# Altium PCB NetV520.PcbDoc
Units mil, origin at the board's own origin, x right, y up, seen from the top; angles counter-clockwise.
Board outline 2215 x 1456.69 mil, 2 copper layers (Top Layer, Bottom Layer); 83 components, 81 nets, 326 pads, 111 vias.
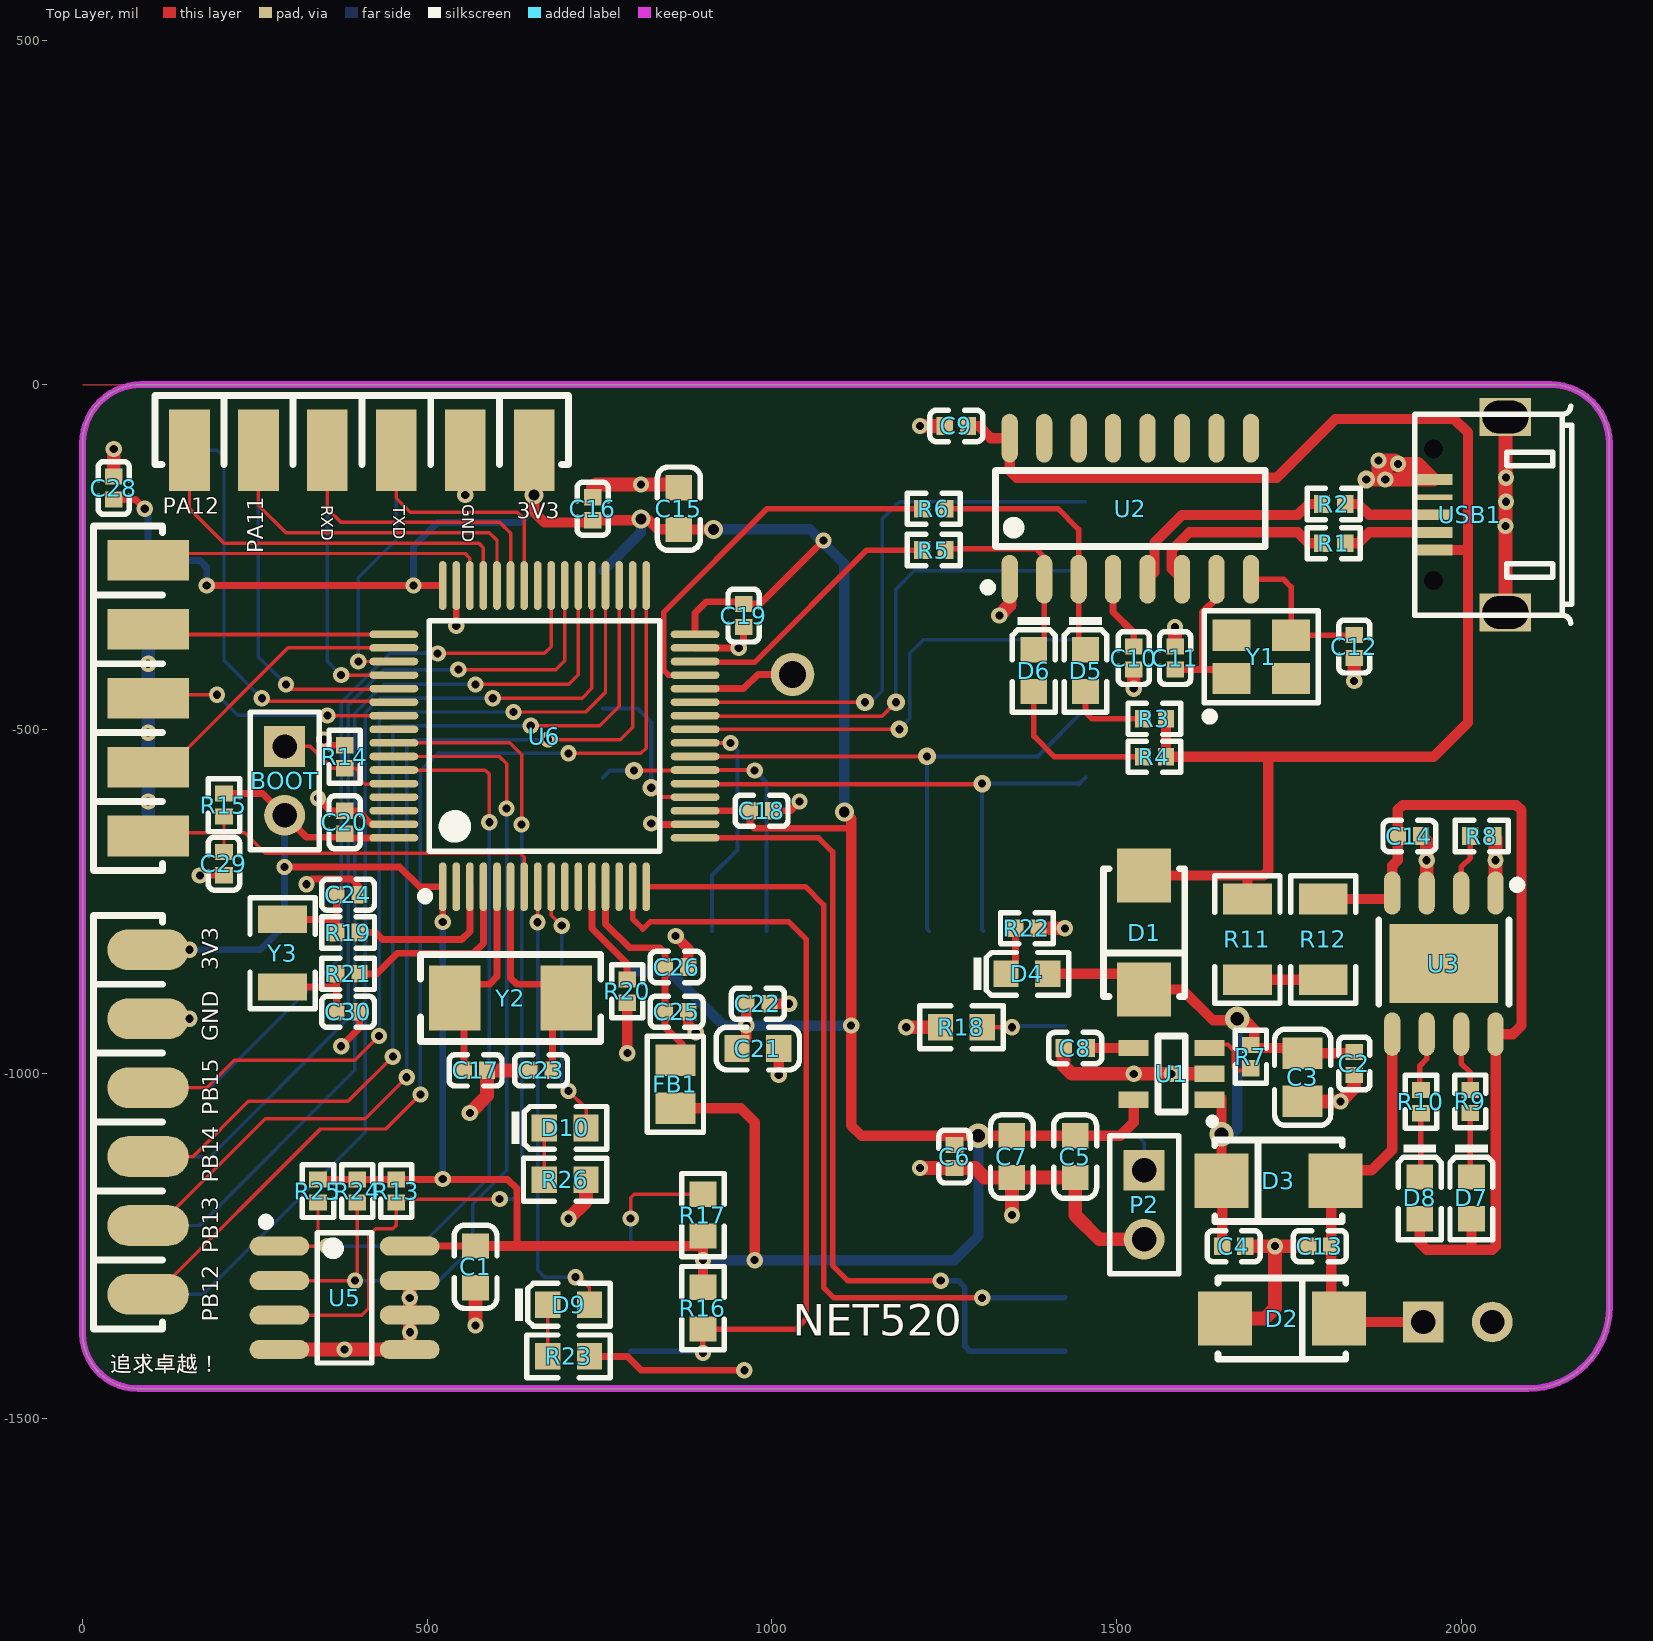
[diagram p0: Top Layer view]
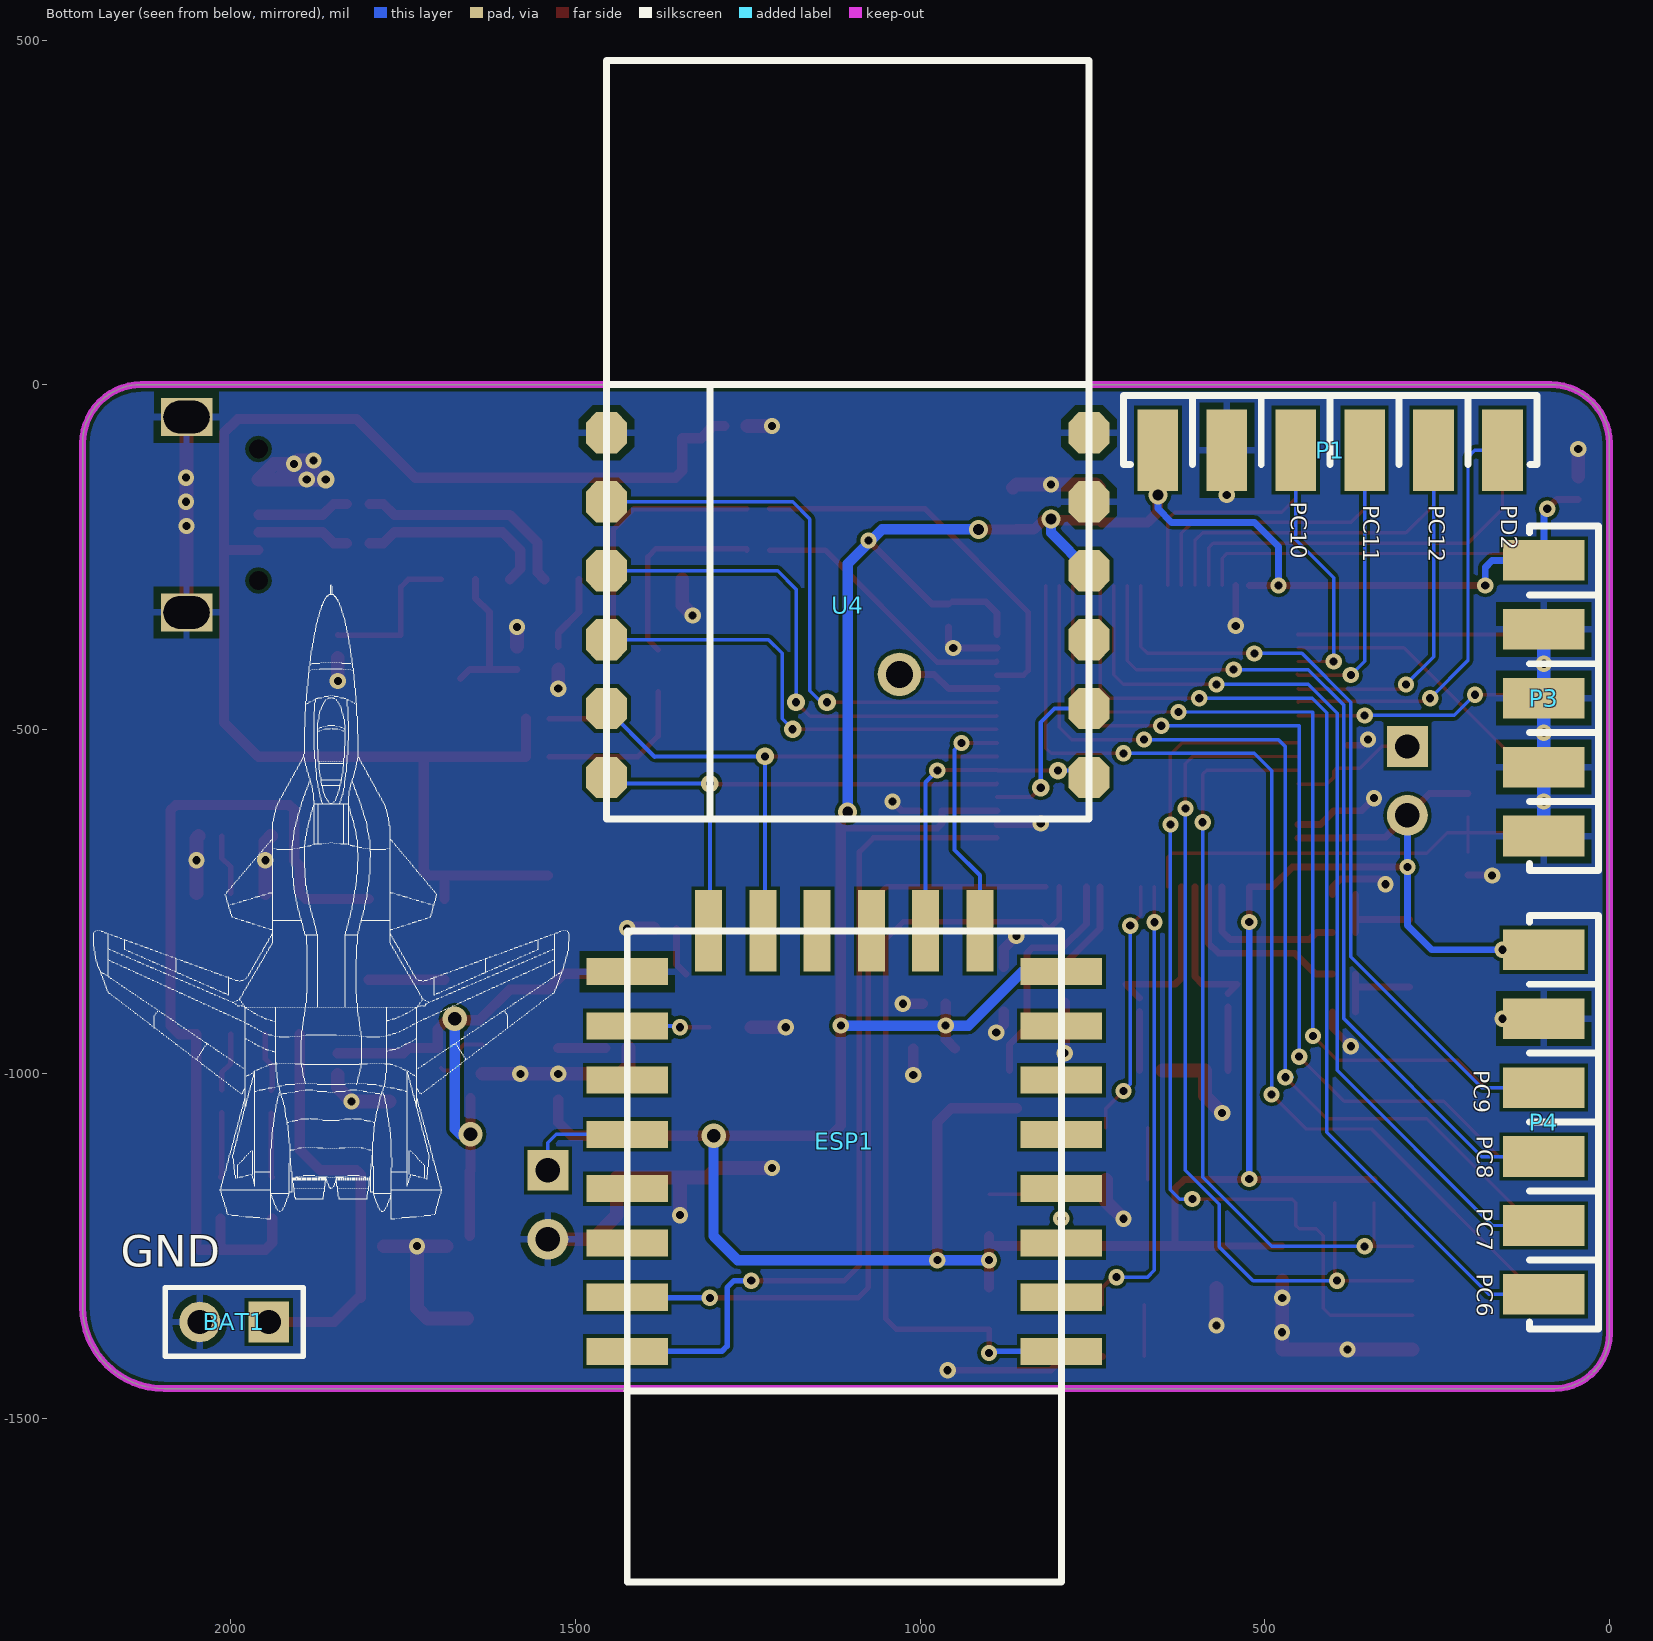
[diagram p1: Bottom Layer view, seen from below]

## Layer stack, top to bottom
Top Solder: solder mask 0.4, Solder Resist, Dk 3.5
Top Layer: signal copper 1.4
Dielectric 1: dielectric 12.6, FR-4, Dk 4.8
Bottom Layer: signal copper 1.4
Bottom Solder: solder mask 0.4, Solder Resist, Dk 3.5

## Board outline
0,-1376.69 ccw(c80,-1376.69) 80,-1456.69 2096.89,-1456.69 ccw(c2096.89,-1338.58) 2215,-1338.58 2215,-85 ccw(c2130,-85) 2130,0 85,0 ccw(c85,-85) 0,-85

## Design rules (kind name [scope] priority, off if disabled: settings)
Clearance [All] p1: gap=5 ignorepadtopadclearanceinfootprint=FALSE except(0: Arc-Hole Track-Hole SMDPad-Hole THPad-Hole Via-Hole Fill-Hole Poly-Hole Region-Hole Text-Hole; 10: Arc-Text Track-Text SMDPad-Text THPad-Text Via-Text Fill-Text Poly-Text Region-Text Text-Text)
DiffPairsRouting [All] p1: maxlimit=10 minlimit=10 mostfreqgap=10 toplayer_minwidth=15 toplayer_maxwidth=15 toplayer_prefwidth=15 bottomlayer_minwidth=15 bottomlayer_maxwidth=15 bottomlayer_prefwidth=15 maxuncoupledlength=500
PolygonConnect [All] p1: thpad.connectstyle=Relief thpad.reliefconductorwidth=10 thpad.reliefentries=4 thpad.polygonreliefangle="90 Angle" thpad.airgapwidth=10 smdpad.connectstyle=Relief smdpad.reliefconductorwidth=10 smdpad.reliefentries=4 smdpad.polygonreliefangle="90 Angle" smdpad.airgapwidth=10 via.connectstyle=Direct via.reliefconductorwidth=10 via.reliefentries=4 via.polygonreliefangle="90 Angle" via.airgapwidth=10
RoutingVias [All] p1: holewidth=28 width=50 viastyle="Through Hole" minholewidth=11.81 minwidth=23.62 maxholewidth=28 maxwidth=50
SolderMaskExpansion [All] p1: expansion=4
Width [All] p1: maxlimit=80 minlimit=5 preferedwidth=10 minimp=50.000000 maximp=50.000000 favimp=50.000000
29 further rules are at their usual default settings.

## Classes and differential pairs
differential pair USB: +USB_P -USB_N
differential pair USB0: +USB0_P -USB0_N

## Components (designator, comment, footprint, x,y, rotation, side; value= is the part's Value field where it differs from the comment)
BAT1 "Header 2" HDR1X2 1945,-1360 r0 bottom
BOOT "Header 2" HDR1X2 292.95,-525 r270 top
C1 "22uF (226) 20% 6.3V" 0603_C 570,-1280 r90 top
C2 "1.0uF (105) 10% 25V" 0402_C 1845,-985 r90 top
C3 "22uF (226) 20% 25V" 0805_C 1770,-1005 r90 top
C4 "10nF (103) 10% 50V" 0402_C 1670,-1250 r180 top
C5 "2.2uF (225) 10% 16V" 0603_C 1440,-1120 r270 top
C6 "10nF (103) 10% 50V" 0402_C 1265,-1120 r270 top
C7 "22uF (226) 20% 6.3V" 0603_C 1348.27,-1120 r270 top
C8 "22nF (223) 10% 50V" 0402_C 1440,-962.6 r180 top
C9 "4.7uF (475) 20% 10V" 0402_C 1267.64,-60 r0 top
C10 "1.0uF (105) 10% 25V" 0402_C 1525,-396.73 r90 top
C11 "22pF (220) 5% 50V" 0402_C 1585,-396.73 r270 top
C12 "22pF (220) 5% 50V" 0402_C 1845,-380 r90 top
C13 "10uF" 0402_C 1795,-1250 r0 top
C14 "10uF" 0402_C 1925,-655 r180 top
C15 "22uF (226) 20% 6.3V" 0603_C 865,-180 r90 top
C16 "100nF (104) 10% 16V" 0402_C 740,-180 r270 top
C17 "20pF (200) 5% 50V" 0402_C 570,-995 r180 top
C18 "100nF (104) 10% 16V" 0402_C 985,-618.27 r180 top
C19 "100nF (104) 10% 16V" 0402_C 958.9,-335 r90 top
C20 "100nF (104) 10% 16V" 0402_C 380,-635 r270 top
C21 "22uF (226) 20% 6.3V" 0603_C 979.64,-963.27 r180 top
C22 "100nF (104) 10% 16V" 0402_C 979.64,-898.27 r180 top
C23 "20pF (200) 5% 50V" 0402_C 665,-995 r0 top
C24 "4.7pF (4R7) 0.25pF 50V" 0402_C 385,-740 r180 top
C25 "100nF (104) 10% 16V" 0402_C 861.77,-910 r0 top
C26 "10nF (103) 10% 50V" 0402_C 861.77,-845 r0 top
C28 "100nF (104) 10% 16V" 0402_C 45,-150 r90 top
C29 "100nF (104) 10% 16V" 0402_C 205,-695 r90 top
C30 "4.7pF (4R7) 0.25pF 50V" 0402_C 385,-910 r180 top
D1 "SS54" SMA(DO-214AC)_S1 1540,-795 r90 top
D2 "M7" SMA(DO-214AC)_S1 1740,-1355 r180 top
D3 "SS54" SMA(DO-214AC)_S1 1735,-1155 r0 top
D4 "白灯 0603" 0603_LED_S1 1370,-855 r0 top
D5 "黄灯 0603" 0603_LED_S1 1455,-415 r270 top
D6 "绿灯 0603" 0603_LED_S1 1380,-415 r270 top
D7 "红灯 0603" 0603_LED_S1 2015,-1180 r270 top
D8 "绿灯 0603" 0603_LED_S1 1940,-1180 r270 top
D9 "蓝灯 0603" 0603_LED_S1 705,-1335 r0 top
D10 "黄灯 0603" 0603_LED_S1 700,-1078.51 r0 top
ESP1 "ESP-12" ESP-12 1110,-1265 r0 bottom locked
FB1 "600Ω ±25% 100MHz" 0805_L 860,-1015 r90 top
P1 "Header 6X2A" "SMT-HEADER 6*2"#1 405,-95 r90 bottom
P2 "Header 2" HDR1X2 1540,-1140 r270 top
P3 "Header 5X2A" "SMT HEADER 5*2" 95,-455 r180 bottom
P4 "Header 6X2A" "SMT-HEADER 6*2"#2 95,-1070 r180 bottom
R1 "0Ω (0R0) ±1%" 0402_R 1815,-230 r180 top
R2 "0Ω (0R0) ±1%" 0402_R 1815,-173.23 r180 top
R3 "2KΩ (2001) ±1%" 0402_R 1555,-485 r0 top
R4 "2KΩ (2001) ±1%" 0402_R 1555,-540 r180 top
R5 "51Ω (51R0) ±1%" 0402_R 1235,-240 r0 top
R6 "51Ω (51R0) ±1%" 0402_R 1235,-180 r0 top
R7 "0Ω (0R0) ±1%" 0402_R 1695,-975 r270 top
R8 "1.2KΩ" 0402_R 2030,-655 r180 top
R9 "1KΩ" 0402_R 2013.27,-1040.04 r270 top
R10 "1KΩ" 0402_R 1941.73,-1040.31 r270 top
R11 "0.1Ω (R100) ±1%" 1206_R 1690,-805 r270 top
R12 "0.1Ω (R100) ±1%" 1206_R 1800,-805 r90 top
R13 "200KΩ (2003) ±1%" 0402_R 455,-1170 r90 top
R14 "10KΩ (1002) ±1%" 0402_R 380,-540 r90 top
R15 "10KΩ (1002) ±1%" 0402_R 205,-610 r270 top
R16 "10KΩ" 0603_R 900,-1340 r270 top
R17 "1KΩ" 0603_R 900,-1205 r90 top
R18 "1KΩ" 0603_R 1275,-932.4 r180 top
R19 "0Ω (0R0) ±1%" 0402_R 385,-795 r0 top
R20 "0Ω (0R0) ±1%" 0402_R 790,-880 r270 top
R21 "0Ω (0R0) ±1%" 0402_R 385,-855 r0 top
R22 "7.5KΩ (7501) ±1%" 0402_R 1370,-788.9 r0 top
R23 "3KΩ (3001) ±1%" 0603_R 705,-1410 r0 top
R24 "10KΩ (1002) ±1%" 0402_R 398.27,-1170 r90 top
R25 "10KΩ (1002) ±1%" 0402_R 341.42,-1170 r90 top
R26 "3KΩ (3001) ±1%" 0603_R 700,-1153.51 r0 top
U1 "BL9193-33" LC-SOT-23-5 1580,-1000 r0 top
U2 "CH340G" SOIC-16_150mil 1520,-180 r0 top
U3 "TP4056" SOP-8_EP_150mil 1975,-840 r180 top
U4 "MRF24J40" MRF24J40 1455,-630 r180 bottom locked
U5 "LM75B" LC-SOIC-8_150mil 380,-1325 r270 top
U6 "STM32F103RET6" LQFP-64_10x10x05P 670,-510 r0 top
USB1 "USB_5line" USB-MICRO-5P-2F 1960,-240 r270 top
Y1 "12MHZ 20PF 10PPM" SMD-3225_4P 1710,-395 r0 top
Y2 "8MHz ±20ppm 20pF" SMD-5032_2P 620.79,-890 r180 top
Y3 "32.768KHz ±20ppm 12.5pF" "SMD-3215_2P FC - 135" 290,-825 r90 top

## Footprints (in the part's own frame and the unit in brackets; to place one, negate y for a bottom-side part, rotate by r counter-clockwise, add the part's x,y. Pads: shape width x height; smd on the part's side, far side on the other; paste and mask are expansions set on the pad)
0402_C [mm]
  rect 0.6x0.65 smd mask+0.051: 1(-0.425,0) 2(0.425,0)
  silkscreen extent -0.97,-0.58 0.97,0.58, body extent -0.48,-0.3 0.52,0.3, height 0.2
0402_R [mm]
  rect 0.6x0.65 smd mask+0.051: 1(-0.425,0) 2(0.425,0)
  silkscreen extent -0.97,-0.58 0.97,0.58, body extent -0.57,-0.27 0.58,0.28, height 0.41
0603_C [mm]
  rect 0.93x0.98 smd: 1(-0.77,0) 2(0.77,0)
  silkscreen extent -1.53,-0.79 1.54,0.79, body extent -0.8,-0.4 0.8,0.4, height 0.3
0603_LED_S1 [mm]
  rect 0.93x0.98 smd: A(0.77,0) K(-0.77,0)
  silkscreen extent -1.97,-0.79 1.54,0.79, body extent -0.8,-0.4 0.8,0.4, height 0.6
0603_R [mm]
  rect 0.93x0.98 smd: 1(-0.77,0) 2(0.77,0)
  silkscreen extent -1.53,-0.79 1.54,0.79, body extent -0.85,-0.4 0.85,0.4, height 0.56
0805_C [mm]
  rect 1.16x1.47 smd: 1(-0.89,0) 2(0.89,0)
  silkscreen extent -1.77,-1.04 1.77,1.04, body extent -1,-0.62 1,0.63, height 0.77
0805_L [mm]
  rect 1.16x1.47 smd: 1(-0.89,0) 2(0.89,0)
  silkscreen extent -1.77,-1.04 1.77,1.03, body extent -1.02,-0.64 1.03,0.64, height 0.6
1206_R [mm]
  rect 1.13x1.8 smd: 1(-1.49,0) 2(1.49,0)
  silkscreen extent -2.36,-1.2 2.35,1.2, body extent -1.7,-0.86 1.65,0.87, height 0.85
ESP-12 [mm]
  rect 3x1 smd: 1(-8,3.5) 2(-8,1.5) 3(-8,-0.5) 4(-8,-2.5) 5(-8,-4.5) 6(-8,-6.5) 7(-8,-8.5) 8(-8,-10.5) 15(8,-10.5) 16(8,-8.5) 17(8,-6.5) 18(8,-4.5) 19(8,-2.5) 20(8,-0.5) 21(8,1.5) 22(8,3.5)
  rect 1x3 smd: 9(-5,-12) 10(-3,-12) 11(-1,-12) 12(1,-12) 13(3,-12) 14(5,-12)
  silkscreen extent -8,-12 8,12
HDR1X2 [mm] "Connector; Header; 2 Position"
  rect 1.5x1.5 hole 0.9: 1(0,0)
  round 1.5 hole 0.9: 2(2.54,0)
  silkscreen extent -1.27,-1.27 3.81,1.27, body extent -1.27,-1.27 3.81,1.27, height 7.58
LC-SOIC-8_150mil [mm]
  oval 0.7x2.2 smd: 1(-1.905,-2.4) 2(-0.635,-2.4) 3(0.635,-2.4) 4(1.905,-2.4) 5(1.905,2.4) 6(0.635,2.4) 7(-0.635,2.4) 8(-1.905,2.4)
  silkscreen extent -2.95,-3.05 2.4,1
LC-SOT-23-5 [mm] "BL9193"
  rect 1.1x0.6 smd: 1(1.4,-0.95) 2(1.4,0) 3(1.4,0.95) 4(-1.4,0.95) 5(-1.4,-0.95)
  silkscreen extent -0.5,-1.87 1.63,1.4
LQFP-64_10x10x05P [mm]
  oval 0.28x1.8 smd mask+0.051: 1(-3.75,-5.55) 2(-3.25,-5.55) 3(-2.75,-5.55) 4(-2.25,-5.55) 5(-1.75,-5.55) 6(-1.25,-5.55) 7(-0.75,-5.55) 8(-0.25,-5.55) 9(0.25,-5.55) 10(0.75,-5.55) 11(1.25,-5.55) 12(1.75,-5.55) 13(2.25,-5.55) 14(2.75,-5.55) 15(3.25,-5.55) 16(3.75,-5.55) 33(3.75,5.55) 34(3.25,5.55) 35(2.75,5.55) 36(2.25,5.55) 37(1.75,5.55) 38(1.25,5.55) 39(0.75,5.55) 40(0.25,5.55) 41(-0.25,5.55) 42(-0.75,5.55) 43(-1.25,5.55) 44(-1.75,5.55) 45(-2.25,5.55) 46(-2.75,5.55) 47(-3.25,5.55) 48(-3.75,5.55)
  oval 1.8x0.28 smd mask+0.051: 17(5.55,-3.75) 18(5.55,-3.25) 19(5.55,-2.75) 20(5.55,-2.25) 21(5.55,-1.75) 22(5.55,-1.25) 23(5.55,-0.75) 24(5.55,-0.25) 25(5.55,0.25) 26(5.55,0.75) 27(5.55,1.25) 28(5.55,1.75) 29(5.55,2.25) 30(5.55,2.75) 31(5.55,3.25) 32(5.55,3.75) 49(-5.55,3.75) 50(-5.55,3.25) 51(-5.55,2.75) 52(-5.55,2.25) 53(-5.55,1.75) 54(-5.55,1.25) 55(-5.55,0.75) 56(-5.55,0.25) 57(-5.55,-0.25) 58(-5.55,-0.75) 59(-5.55,-1.25) 60(-5.55,-1.75) 61(-5.55,-2.25) 62(-5.55,-2.75) 63(-5.55,-3.25) 64(-5.55,-3.75)
  silkscreen extent -4.55,-6.05 4.25,4.25
MRF24J40 [mil]
  oct 60x60 smd: 1(0,560) 2(0,460) 3(0,360) 4(0,260) 5(0,160) 6(0,60) 7(700,60) 8(700,160) 9(700,260) 10(700,360) 11(700,460) 12(700,560)
  silkscreen extent 0,0 700,1100
SMA(DO-214AC)_S1 [mm]
  rect 2x2 smd: 1(2.1,0) 2(-2.1,0)
  silkscreen extent -2.35,-1.5 2.35,1.5
"SMD-3215_2P FC - 135" [mm]
  rect 1x1.8 smd: 1(-1.25,0) 2(1.25,0)
  silkscreen extent -2.05,-1.2 2.05,1.2
SMD-3225_4P [mm]
  rect 1.4x1.15 smd: 1(-1.1,-0.8) 2(1.1,-0.8) 3(1.1,0.8) 4(-1.1,0.8)
  silkscreen extent -2.1,-2.35 2.1,1.7, body extent -1.6,-1.25 1.6,1.25, height 0.61
SMD-5032_2P [mm]
  rect 1.9x2.4 smd: 1(-2.05,0) 2(2.05,0)
  silkscreen extent -3.32,-1.6 3.32,1.6
"SMT HEADER 5*2" [mm]
  rect 3x1.5 smd: 1(0,5.08) 2(0,2.54) 3(0,0) 4(0,-2.54) 5(0,-5.08)
  rect 3x1.5 smd far side: 6(0,5.08) 7(0,2.54) 8(0,0) 9(0,-2.54) 10(0,-5.08)
  silkscreen extent -0.53,-6.35 2.01,6.35
"SMT-HEADER 6*2"#1 [mm]
  rect 3x1.5 smd: 1(0,6.35) 2(0,3.81) 3(0,1.27) 4(0,-1.27) 5(0,-3.81) 6(0,-6.35)
  rect 3x1.5 smd far side: 7(0,6.35) 8(0,3.81) 9(0,1.27) 10(0,-1.27) 11(0,-3.81) 12(0,-6.35)
  silkscreen extent -0.53,-7.62 2.01,7.62
"SMT-HEADER 6*2"#2 [mm]
  rect 3x1.5 smd: 1(0,6.35) 2(0,3.81) 3(0,1.27) 4(0,-1.27) 5(0,-3.81) 6(0,-6.35)
  oval 3x1.5 smd far side: 7(0,6.35) 8(0,3.81) 9(0,1.27) 10(0,-1.27) 11(0,-3.81) 12(0,-6.35)
  silkscreen extent -0.53,-7.62 2.01,7.62
SOIC-16_150mil [mm]
  oval 0.6x1.8 smd: 1(-4.445,-2.6) 2(-3.175,-2.6) 3(-1.905,-2.6) 4(-0.635,-2.6) 5(0.635,-2.6) 6(1.905,-2.6) 7(3.175,-2.6) 8(4.445,-2.6) 9(4.445,2.6) 10(3.175,2.6) 11(1.905,2.6) 12(0.635,2.6) 13(-0.635,2.6) 14(-1.905,2.6) 15(-3.175,2.6) 16(-4.445,2.6)
  silkscreen extent -5.4,-3.05 4.97,1.4, body extent -4.95,-2.97 4.95,3.03, height 1.75
SOP-8_EP_150mil [mm]
  rect 4x2.9 smd: 0(0,0)
  oval 0.6x1.6 smd: 1(-1.905,-2.6) 2(-0.635,-2.6) 3(0.635,-2.6) 4(1.905,-2.6) 5(1.905,2.6) 6(0.635,2.6) 7(-0.635,2.6) 8(-1.905,2.6)
  silkscreen extent -2.85,-3.05 2.4,1.5
USB-MICRO-5P-2F [mm]
  round 0 hole 0.7: 0(-3.725,0) 0(1.125,0)
  rect 0.4x1.4 smd: 1(0,0) 2(-0.65,0) 3(-1.3,0) 5(-2.6,0)
  rect 0.2x1.4 smd: 4(-1.95,0)
  rect 1.4x1.9 hole 1.2 slot 1.7 at 90 deg: 6(2.3,2.65) 7(-4.9,2.65)
  silkscreen extent -5.3,-0.7 2.7,5.1

## Part data
BAT1 BOOT P2: "Header, 2-Pin", LatestRevisionDate=17-Jul-2002, LatestRevisionNote="Re-released for DXP Platform.", Publisher="Altium Limited"
C1 C7 C15 C21: library part "0603 22uF (226) 20% 6.3V", "贴片电容", Package=0603, SuppliersPartNumber=C59461, ComponentLink1URL=http://www.szlcsc.com/product/details_60514.html, Supplier=LC
  C1 C15 C21: ComponentLink1Description=供应商链接
  C7: ComponentLink1Description=供应商
C2 C10: library part "0402 1.0uF (105) 10% 25V", "贴片电容", Package=0402, SuppliersPartNumber=C52923, ComponentLink1Description=供应商, ComponentLink1URL=http://www.szlcsc.com/product/details_53938.html, Supplier=LC
C3: library part "0805 22uF (226) 20% 25V", "贴片电容", Package=0805, SuppliersPartNumber=C45783, ComponentLink1Description=供应商, ComponentLink1URL=http://www.szlcsc.com/product/details_46786.html, Supplier=LC
C4 C6 C26: library part "0402 10nF (103) 10% 50V", "贴片电容", Package=0402, SuppliersPartNumber=C15195, ComponentLink1Description=供应商, ComponentLink1URL=http://www.szlcsc.com/product/details_15869.html, Supplier=LC
C5: library part "0603 2.2uF (225) 10% 16V", "贴片电容", Package=0603, SuppliersPartNumber=C23630, ComponentLink1Description=供应商, ComponentLink1URL=http://www.szlcsc.com/product/details_24366.html, Supplier=LC
C8: library part "0402 22nF (223) 10% 50V", "贴片电容", Package=0402, SuppliersPartNumber=C1532, ComponentLink1Description=供应商, ComponentLink1URL=http://www.szlcsc.com/product/details_1884.html, Supplier=LC
C9: library part "0402 4.7uF (475) 20% 10V", "贴片电容", Package=0402, SuppliersPartNumber=C23733, ComponentLink1Description=供应商, ComponentLink1URL=http://www.szlcsc.com/product/details_24469.html, Supplier=LC
C11 C12: library part "0402 22pF (220) 5% 50V", "贴片电容", Package=0402, SuppliersPartNumber=C1555, ComponentLink1Description=供应商, ComponentLink1URL=http://www.szlcsc.com/product/details_1907.html, Supplier=LC
C13 C14: library part "0402 10uF (106) 20% 6.3V", "贴片电容", Package=0402, SuppliersPartNumber=C15525, ComponentLink1Description=供应商链接, ComponentLink1URL=http://www.szlcsc.com/product/details_16204.html, Supplier=LC
C16 C18 C19 C20 C22 C25 C28 C29: library part "0402 100nF (104) 10% 16V", "贴片电容", Package=0402, SuppliersPartNumber=C1525, ComponentLink1URL=http://www.szlcsc.com/product/details_1877.html, Supplier=LC
  C16 C18 C19 C20 C22 C25 C29: ComponentLink1Description=供应商
  C28: ComponentLink1Description=供应商链接
C17 C23: library part "0402 20pF (200) 5% 50V", "贴片电容", Package=0402, SuppliersPartNumber=C1554, ComponentLink1Description=供应商, ComponentLink1URL=http://www.szlcsc.com/product/details_1906.html, Supplier=LC
C24 C30: library part "0402 4.7pF (4R7) 0.25pF 50V", "贴片电容", Package=0402, SuppliersPartNumber=C1569, ComponentLink1Description=供应商, ComponentLink1URL=http://www.szlcsc.com/product/details_1921.html, Supplier=LC
D1 D3: library part "SMA(DO-214AC) SS54", "二极管", Package=SMA(DO-214AC), SuppliersPartNumber=C22452, ComponentLink1Description=供应商, ComponentLink1URL=http://www.szlcsc.com/product/details_23178.html, Supplier=LC
D2: library part "SMA(DO-214AC) M7", "二极管", Package=SMA(DO-214AC), SuppliersPartNumber=C95872, ComponentLink1Description=供应商, ComponentLink1URL=http://www.szlcsc.com/product/details_2841.html, Notepad="1N4007 4007 编号C2464 已经停售, 使用新物", Supplier=LC
D4: library part "0603 白灯", "发光二极管", Package=0603, SuppliersPartNumber=C2290, ComponentLink1Description=供应商, ComponentLink1URL=http://www.szlcsc.com/product/details_2663.html, Supplier=LC
D5 D10: library part "0603 黄灯", "发光二极管", Package=0603, SuppliersPartNumber=C72038, ComponentLink1Description=供应商, ComponentLink1URL=http://www.szlcsc.com/product/details_73147.html, Supplier=LC
D6 D8: library part "0603 绿灯", "发光二极管", Package=0603, SuppliersPartNumber=C72043, ComponentLink1URL=http://www.szlcsc.com/product/details_73152.html, Supplier=LC
  D6: ComponentLink1Description=供应商
  D8: ComponentLink1Description=供应商链接
D7: library part "0603 红灯", "发光二极管", Package=0603, SuppliersPartNumber=C2286, ComponentLink1Description=供应商链接, ComponentLink1URL=http://www.szlcsc.com/product/details_2659.html, Supplier=LC
D9: library part "0603 蓝灯", "发光二极管", Package=0603, SuppliersPartNumber=C72041, ComponentLink1Description=供应商, ComponentLink1URL=http://www.szlcsc.com/product/details_73150.html, Supplier=LC
FB1: library part "0805 600Ω 25% 100MHz", "贴片磁珠", Package=0805, SuppliersPartNumber=C1017, ComponentLink1Description=供应商, ComponentLink1URL=http://www.szlcsc.com/product/details_1369.html, Supplier=LC
P1 P4: "Header, 6-Pin, Dual row", LatestRevisionDate=17-Jul-2002, LatestRevisionNote="Re-released for DXP Platform.", Publisher="Altium Limited"
P3: "Header, 5-Pin, Dual row", LatestRevisionDate=17-Jul-2002, LatestRevisionNote="Re-released for DXP Platform.", Publisher="Altium Limited"
R1 R2 R7 R19 R20 R21: library part "0402 0Ω (0R0) 1%", "贴片电阻", Package=0402, SuppliersPartNumber=C17168, ComponentLink1Description=供应商, ComponentLink1URL=http://www.szlcsc.com/product/details_17853.html, Supplier=LC
R3 R4: library part "0402 2KΩ (2001) 1%", "贴片电阻", Package=0402, SuppliersPartNumber=C4109, ComponentLink1Description=供应商, ComponentLink1URL=http://www.szlcsc.com/product/details_4516.html, Supplier=LC
R5 R6: library part "0402 51Ω (51R0) 1%", "贴片电阻", Package=0402, SuppliersPartNumber=C25125, ComponentLink1Description=供应商, ComponentLink1URL=http://www.szlcsc.com/product/details_25868.html, Supplier=LC
R8: library part "0402 1.2KΩ (1201) 1%", "贴片电阻", Package=0402, SuppliersPartNumber=C25862, ComponentLink1Description=供应商链接, ComponentLink1URL=http://www.szlcsc.com/product/details_26605.html, Supplier=LC
R9 R10: library part "0402 1KΩ (1001) 1%", "贴片电阻", Package=0402, SuppliersPartNumber=C11702, ComponentLink1Description=供应商链接, ComponentLink1URL=http://www.szlcsc.com/product/details_12256.html, Supplier=LC
R11 R12: library part "1206 0.1Ω (R100) 1%", "贴片电阻", Package=1206, SuppliersPartNumber=C25334, ComponentLink1Description=供应商, ComponentLink1URL=http://www.szlcsc.com/product/details_26077.html, Supplier=LC
R13: library part "0402 200KΩ (2003) 1%", "贴片电阻", Package=0402, SuppliersPartNumber=C25764, ComponentLink1Description=供应商, ComponentLink1URL=http://www.szlcsc.com/product/details_26507.html, Supplier=LC
R14 R15 R24 R25: library part "0402 10KΩ (1002) 1%", "贴片电阻", Package=0402, SuppliersPartNumber=C25744, ComponentLink1URL=http://www.szlcsc.com/product/details_26487.html, Supplier=LC
  R14 R15: ComponentLink1Description=供应商
  R24 R25: ComponentLink1Description=供应商链接
R16: library part "0603 10KΩ (1002) 1%", "贴片电阻", Package=0603, SuppliersPartNumber=C25804, ComponentLink1Description=供应商, ComponentLink1URL=http://www.szlcsc.com/product/details_26547.html, Supplier=LC
R17 R18: library part "0603 1KΩ (1001) 1%", "贴片电阻", Package=0603, SuppliersPartNumber=C21190, ComponentLink1Description=供应商, ComponentLink1URL=http://www.szlcsc.com/product/details_21904.html, Supplier=LC
R22: library part "0402 7.5KΩ (7501) 1%", "贴片电阻", Package=0402, SuppliersPartNumber=C25918, ComponentLink1Description=供应商, ComponentLink1URL=http://www.szlcsc.com/product/details_26661.html, Supplier=LC
R23 R26: library part "0603 3KΩ (3001) 1%", "贴片电阻", Package=0603, SuppliersPartNumber=C4211, ComponentLink1Description=供应商, ComponentLink1URL=http://www.szlcsc.com/product/details_4618.html, Supplier=LC
U2: library part CH340G_[C14267], "USB", Package=SOIC-16_150mil, SuppliersPartNumber=C14267, ComponentLink1Description=供应商, ComponentLink1URL=http://www.szlcsc.com/product/details_14927.html, Supplier=LC
U3: library part TP4056_[C16581], "电池电源管理", Package=SOP-8_EP_150mil, SuppliersPartNumber=C16581, ComponentLink1Description=供应商链接, ComponentLink1URL=http://www.szlcsc.com/product/details_17264.html, Supplier=LC
U6: "ARM", Package=LQFP-64_10x10x05P, SuppliersPartNumber=C8322, ComponentLink1Description=供应商链接, ComponentLink1URL=http://www.szlcsc.com/product/details_8814.html, Supplier=LC
Y1: library part "SMD-3225_4P  12MHZ 20PF 10PPM", "贴片晶振", Package=SMD-3225_4P, SuppliersPartNumber=C9002, ComponentLink1Description=供应商, ComponentLink1URL=http://www.szlcsc.com/product/details_9522.html, Supplier=LC
Y2: library part "SMD-5032_2P 8MHz 20ppm 20pF", "贴片晶振", Package=SMD-5032_2P, SuppliersPartNumber=C115962, ComponentLink1Description=供应商, ComponentLink1URL=http://www.szlcsc.com/product/details_117214.html, Supplier=LC
Y3: library part "SMD-3215_2P 32.768KHz 20ppm 12.5pF", "贴片晶振", Package=SMD-3215_2P, SuppliersPartNumber=C32346, ComponentLink1Description=供应商, ComponentLink1URL=http://www.szlcsc.com/product/details_33310.html, Supplier=LC

## Free pads (board coordinates)
  round 62.99 hole 39.37: 2(1030,-420.36)

## Via types
v1: diameter 23.62, hole 11.81, Top Layer to Bottom Layer, tented both sides, 96 vias
v2: diameter 25.59, hole 11.81, Top Layer to Bottom Layer, tented both sides, 8 vias
v3: diameter 27.56, hole 15.75, Top Layer to Bottom Layer, tented both sides, 4 vias
v4: diameter 35.43, hole 19.68, Top Layer to Bottom Layer, tented both sides, 3 vias

## Nets (pads, with @x,y where several pads share a name; then routed paths per layer and width w, separated by ;. In a path a pad name is that pad's centre, name@x,y a point inside that pad or via, vN(x,y) a via of type N, cw(c..) or ccw(c..) an arc to the next point about the centre after c; other vN are vias at no path point)
3.3V: BOOT.2 C1.2 C5.1 C6.1 C7.1 C15.1 C16.2 C18.2 C19.2 C20.2 C21.2 C22.2 C28.1 ESP1.8 FB1.1 P1.1 P1.7 P3.1 P4.1 P4.7 R13.2 R15.1 R16.1 R17.1 R24.2 R25.2 U1.5 U4.10 U5.8 U6.1 U6.19 U6.32 U6.48 U6.64 | length 6742
  Top Layer w10: C28.1 76.73,-166.73 v1(90,-180) ; v1(180,-291.5) v1(480,-291.5) U6.48 ; R15.1 261.22,-593.27 BOOT.2 324.69,-656.73 380,-656.73 380.91,-657.64 U6.64 ; v1(292.95,-700) 460,-700 488.5,-728.5 U6.1 v1(522.36,-779.84) ; R25.2 R24.2 R13.2 616.69,-1153.27 630,-1166.57 630,-1249.68 ; U5.8 569.68,-1250 C1.2 ; C16.2@736.73,-200 C16.2 ; U6.19 C18.2 968.27,-636.91 975,-643.64 1113.64,-643.64 1115,-645 ; U6.32 888.5,-331.5 905,-315 C19.2@953.27,-315 ; v3@914.69,-210.32 v3(915,-210) ; C19.2 982.83,-318.27 v1(1075,-226.1)
  Top Layer w15: C1.2 630,-1249.68 R17.1@900,-1249.68 ; P1.7 v3(655,-160) 655,-185 670,-200 C16.2@736.73,-200 ; C16.2 821.42,-196.73 834.68,-210 C15.1@860,-210 ; FB1.1 955.04,-1050.04 975,-1070 v1(975,-1270.32) ; C15.1 v3@914.69,-210.32 ; R16.1 v1(900,-1270.32) R17.1@900,-1249.68 ; R17.1 R17.1@900,-1249.68 ; C21.2 962.91,-949.69 v1(962.91,-930) C22.2 ; v3(1105,-620) 1115,-630 1115,-645 v1(1115,-930) 1115,-1075 1130,-1090 1210,-1090 1210.31,-1089.68 C7.1 C5.1 1505.31,-1089.68 1524.88,-1070.12 U1.5
  Bottom Layer w10: v1(90,-180) 95,-185 P3.1 170,-255 180,-265 v1(180,-291.5) ; v1(155,-820) 257.56,-820 292.95,-784.61 v1(292.95,-700) BOOT.2 ; v1(480,-291.5) 480,-235 515,-200 635,-200 655,-180 v3(655,-160) ; v1(522.36,-1152.64) v1(522.36,-779.84)
  Bottom Layer w15: U4.10 810,-215 v3(810,-195) ; ESP1.8 851.61,-851.61 930,-930 v1(962.91,-930) v1(1115,-930) ; v1(900,-1270.32) v1(975,-1270.32) 1264.68,-1270.32 1299.69,-1235.32 v4(1299.69,-1090) ; v3(915,-210) 1055,-210 1105,-260 v3(1105,-620)
4V2: BAT1.1 C13.2 D2.2 D3.1 U3.5 | length 597.6
  Top Layer w15: U3.5 1900,-1110 1870,-1140 1817.68,-1140 1811.73,-1145.94 1811.73,-1235 1811.73,-1325 1815,-1325 1850,-1360 BAT1.1
AGND: R20.1 U6.12 | length 155.9
  Top Layer w10: U6.12 738.9,-788.9 790,-840 R20.1
AVDD: C25.1 C26.1 FB1.2 U6.13 | length 338.4
  Top Layer w10: U6.13 758.58,-782.48 793.1,-817 837,-817 845.04,-825.04 C26.1 C25.1 845.04,-932.4 870.04,-957.4 FB1.2@870.04,-995
BOOT0: BOOT.1 R14.1 U6.60 | length 187.1
  Top Layer w5: BOOT.1 330,-525 361.73,-556.73 R14.1 395.79,-556.73 400,-560.94 400,-570 410,-580 450.39,-580 U6.60
BOOT1: pad.2 U6.28 | length 150.1
  Top Layer w10: U6.28 958.9,-441.1 979.64,-420.36 pad.2
CH340_RXD: D5.K R6.2 U2.3 | length 384.5
  Top Layer w8: R6.2 1415,-180 1445,-210 U2.3 1445,-374.69 D5.K
CH340_TXD: D6.K R5.2 U2.2 | length 291.2
  Top Layer w8: R5.2 1251.73,-237.93 1382.93,-237.93 1395,-250 U2.2 1395,-369.69 D6.K
ESP-RST: ESP1.1 R16.2 U6.15 | length 1166.8
  Top Layer w8: U6.15 797.95,-775 812.95,-790 823.76,-779.19 1024.19,-779.19 1050,-805 1050,-1355 1034.68,-1370.32 R16.2 v1(900,-1405)
  Bottom Layer w8: ESP1.1 897.8,-1402.8 v1(900,-1405)
GND: BAT1.2 C1.1 C2.1 C3.1 C4.1 C5.2 C6.2 C7.2 C8.2 C9.1 C10.1 C11.1 C12.1 C13.1 C14.1 C15.2 C16.1 C17.1 C18.1 C19.1 C20.1 C21.1 C22.1 C23.1 C24.1 C25.2 C26.2 C28.2 C29.1 C30.1 D2.1 ESP1.15 P1.2 P1.8 P2.2 P3.2 P3.3 P3.4 P3.5 P4.2 P4.8 R8.1 R14.2 R18.2 R20.2 R22.2 R23.2 R26.2 U1.2 U2.1 U3.1 U3.3 U4.1 U4.11 U4.12 U5.4 U5.5 U5.6 U5.7 U6.18 U6.31 U6.47 U6.63 USB1.5 USB1.6 USB1.7 | length 4178.2
  Top Layer w10: v1(170,-712.32) 170.59,-711.73 C29.1 ; v1(324.69,-725) 332.48,-717.2 390.08,-717.2 401.73,-728.86 C24.1 ; v1(341.42,-600) 359.68,-618.27 C20.1 399.64,-618.27 419.32,-637.95 U6.63 ; v1(350,-515) 358.27,-523.27 R14.2 ; v1(375,-960) 401.73,-933.27 C30.1 ; v1(542.05,-350) U6.47 ; R23.2 790.32,-1410 810.32,-1430 v1(960,-1430) ; v1(825,-636.91) 826.05,-637.95 U6.18 ; U6.31 v1(951.85,-382.05) 958.9,-375 C19.1 ; C18.1 1026.73,-618.27 v1(1040,-605)
  Top Layer w15: R20.2 790,-969.65 v1(790.32,-969.96) ; v1(860.31,-800) 878.5,-818.19 C26.2 ; C25.2 878.5,-929.09 v1(889.42,-940) ; C22.1 v1(1025,-898.27) ; C21.1 v1(1010,-1001.73) v1(1010,-1001.73)
  Top Layer w20: C28.2 v1(45,-93.35) ; U5.4 U5.5 U5.6 U5.7 ; v1(561.73,-1056.77) 586.73,-1031.77 C17.1 C23.1 ; v1(570,-1365) C1.1 ; v1(705,-1210.32) 730.32,-1185 R26.2 ; C16.1 740,-150 745,-145 860.31,-145 C15.2 ; v1(1195,-932.4) R18.2 ; v1(1215,-1136.73) C6.2 1295,-1136.73 1308.58,-1150.32 C7.2 ; v1(1215,-60) C9.1 ; v1(1330,-335) 1345,-320 U2.1 ; v1(1348.27,-1205) C7.2 ; R22.2 v1(1425,-788.9) ; C8.2 1423.27,-988.27 1435,-1000 v1(1580,-1000) U1.2 ; v1(1525,-441.1) C10.1 ; P2.2 1475,-1240 1440,-1205 C5.2 C7.2 ; C11.1 v1(1585,-351.73) ; D2.1 1715,-1355 1730,-1340 v1(1730,-1250) ; C4.1 v1(1730,-1250) ; C3.1 v1(1824.96,-1040.04) 1845,-1020 C2.1 ; C13.1 v1(1730,-1250) ; v1(1844.76,-430) 1845,-429.76 C12.1 ; v2(1862.36,-137.64) 1875.63,-137.64 ; C14.1 1950,-663.27 U3.3 ; R8.1 2050,-658.27 U3.1 ; USB1.6 USB1.7 ; 1875.63,-137.64 v1(1890,-137.64) ; 1875.63,-137.64 v1@1882.81,-130.45 ; v1@1882.81,-130.45 v1@1903.27,-110 ; v1@1882.81,-130.45 v1(1890,-137.64) ; v1@1882.81,-130.45 1880,-127.64 v1(1880,-110) v1@1903.27,-110 ; v1(1890,-137.64) 1930.91,-137.64 ; v1@1903.27,-110 v1(1908.27,-115) ; v1(1908.27,-115) 1937.36,-115 USB1.5 1930.91,-137.64 ; v1(1908.27,-115) 1930.91,-137.64
  Bottom Layer w20: P3.5 P3.4 P3.3 P3.2
  other v1: 380,-1400 475,-1375 474.49,-1325 1525,-1000 155,-920 1950,-690 2050,-690 95,-605 95,-505 95,-405 2064.33,-205 2065,-170 555,-160 810,-145 2065,-135
I2C1_SCL: R24.1 U5.2 U6.58 | length 1305.4
  Top Layer w5: U5.2 v1(395,-1300) 398.27,-1296.73 R24.1 ; U6.58@452.12,-539.9 U6.58@451.75,-539.53 ; v1(615,-615) 615,-550 604.53,-539.53 U6.58@451.75,-539.53 ; U6.58@451.75,-539.53 451.62,-539.4 U6.58 U6.58@451.75,-539.53
  Bottom Layer w5: v1(395,-1300) 516.95,-1300 565.69,-1251.26 565.69,-1189.31 615,-1140 v1(615,-615)
I2C1_SDA: R25.1 U5.1 U6.59 | length 1135.9
  Top Layer w5: U5.1 340,-1250 ; R25.1 341.42,-1248.58 340,-1250 ; v1(355,-1250.32) 354.68,-1250 340,-1250 ; U6.59 584.21,-559.21 590,-565 v1(590,-635)
  Bottom Layer w5: v1(355,-1250.32) 489.68,-1250.32 590,-1150 v1(590,-635)
JTAG_TCK: P3.7 U6.49 | length 349.5
  Top Layer w6: P3.7@105,-355 112.36,-362.36 U6.49
JTAG_TDI: P3.9 U6.50 | length 418.1
  Top Layer w5: P3.9@105,-555 125,-555 297.95,-382.05 U6.50
JTAG_TDO: P3.8 U6.55 | length 361
  Top Layer w5: P3.8@105,-455 110,-450 v1(195,-450) ; v1@355,-480.47 U6.55
  Bottom Layer w5: v1(195,-450) 225,-480 v1(355,-480)
JTAG_TMS: P3.6 U6.46 | length 508.5
  Top Layer w5: P3.6@100,-235 110,-245 555.08,-245 561.73,-251.65 U6.46
LED1: D9.A U6.8 | length 674.7
  Top Layer w5: v1(660,-780) 660.16,-779.84 U6.8 ; v1(715,-1295) 715,-1289.68 735.32,-1310 D9.A
  Bottom Layer w5: v1(660,-780) 660,-1285 670,-1295 v1(715,-1295)
LED2: D10.A U6.9 | length 370.9
  Top Layer w5: U6.9 679.84,-769.84 v1(695,-785) ; v1(705,-1025) 730.32,-1050.32 D10.A
  Bottom Layer w5: v1(695,-785) 695,-1015 v1(705,-1025)
MRF_INT: U4.4 U6.25 | length 676.3
  Top Layer w5: U6.25 1184.84,-500.16 v2(1185,-500)
  Bottom Layer w5: v2(1185,-500) 1200.3,-484.7 1200.3,-452.09 1200,-451.79 1200,-390 1220,-370 U4.4
MRF_RST: U4.2 U6.27 | length 833
  Top Layer w5: U6.27 v2(1135,-460.79)
  Bottom Layer w5: v2(1135,-460.79) 1143.58,-460.79 1160,-444.37 1160,-195 1185,-170 U4.2
MRF_WAKE: U4.3 U6.26 | length 750.7
  Top Layer w5: U6.26 888.5,-481.08 1159.7,-481.08 v2(1180,-460.79)
  Bottom Layer w5: v2(1180,-460.79) 1180,-296.62 1206.62,-270 U4.3
n_RST: C29.2 P3.10 R15.2 U6.7 | length 653.9
  Top Layer w5: P3.10@100,-640 110,-650 205,-650 ; C29.2 205,-650 ; R15.2 205,-650 ; U6.7 640.47,-685.47 635,-680 265,-680 235,-650 205,-650
NetC8_1: C8.1 U1.4 | length 68.1
  Top Layer w15: C8.1 U1.4
NetC11_2: C11.2 U2.7 Y1.1 | length 226.5
  Top Layer w10: C11.2 1625,-413.46 ; U2.7 1645,-310 1625,-330 1625,-413.46 ; Y1.1 1653.66,-413.46 1625,-413.46
NetC12_2: C12.2 U2.8 Y1.3 | length 224.8
  Top Layer w8: U2.8 1742.36,-282.36 1753.31,-293.31 Y1.3 1844.76,-363.5 C12.2
NetC17_2: C17.2 U6.5 Y2.2 | length 306.5
  Top Layer w10: C17.2 Y2.2@553.27,-903.19 ; Y2.2@553.27,-883.19 540.08,-870 590,-870 601.1,-858.9 U6.5
NetC23_2: C23.2 U6.6 Y2.1 | length 330
  Top Layer w10: U6.6 620.79,-860.79 630,-870 701.5,-870 Y2.1@681.73,-889.76 ; C23.2 Y2.1@681.73,-909.76
NetC24_2: C24.2 R19.1 Y3.2 | length 133.6
  Top Layer w10: Y3.2 367.48,-775.79 368.27,-775 ; R19.1 368.27,-775 ; C24.2 368.27,-775
NetC30_2: C30.2 R21.1 Y3.1 | length 133.6
  Top Layer w10: Y3.1 367.48,-874.21 368.27,-875 ; C30.2 368.27,-875 ; R21.1 368.27,-875
NetD4_K: D4.K R22.1 | length 71.7
  Top Layer w10: D4.K 1353.27,-841.42 R22.1
NetD5_A: D5.A R3.1 | length 117.4
  Top Layer w8: D5.A 1455,-475.47 1464.53,-485 R3.1
NetD6_A: D6.A R4.2 | length 235.4
  Top Layer w8: D6.A 1380,-510 1410,-540 R4.2
NetD7_K: D7.K R9.2 | length 93.6
  Top Layer w8: R9.2 2013.27,-1147.95 D7.K
NetD8_K: D8.K R10.2 | length 93.4
  Top Layer w8: D8.K 1941.73,-1147.95 R10.2
NetD9_K: D9.K R23.1 | length 75
  Top Layer w5: R23.1 D9.K
NetD10_K: D10.K R26.1 | length 75
  Top Layer w5: R26.1 D10.K
NetESP1_3: ESP1.3 R17.2 | length 172.5
  Top Layer w5: v1(795,-1210) 795,-1180 800.32,-1174.68 R17.2
  Bottom Layer w5: v1(795,-1210) v1(795,-1210) ESP1.3
NetESP1_16: ESP1.16 R18.1 | length 120.5
  Top Layer w6: R18.1 v1(1348.27,-932.4)
  Bottom Layer w6: v1(1348.27,-932.4) 1350.32,-930.35 ESP1.16
NetESP1_18: ESP1.18 P2.1 | length 160.1
  Bottom Layer w5: ESP1.18 1527.83,-1087.83 1540,-1100 P2.1
NetR7_2: R7.2 U1.3 | length 90.8
  Top Layer w6: U1.3@1635.12,-957.6 1661.69,-957.6 1670,-965.91 1670,-990 1675,-995 1691.73,-995 R7.2
NetR8_2: R8.2 U3.2 | length 88.1
  Top Layer w8: U3.2 2000,-700 2013.27,-686.73 R8.2
NetR9_1: R9.1 U3.7 | length 86.4
  Top Layer w8: U3.7 2000,-985 2013.27,-998.27 R9.1
NetR10_1: R10.1 U3.6 | length 86.1
  Top Layer w8: R10.1 1940,-1021.85 1940,-988.27 1950,-978.27 U3.6
NetR11_2: R11.2 R12.1 | length 110
  Top Layer w15: R11.2 R12.1
NetR19_2: R19.2 U6.3 | length 233.8
  Top Layer w10: R19.2 425,-795 435,-805 550,-805 561.73,-793.27 U6.3
NetR21_2: R21.2 U6.4 | length 280.2
  Top Layer w10: R21.2 426.5,-855 456.5,-825 567,-825 581.42,-810.58 U6.4
NJTRST: U6.56
OS_IO: R13.1 U5.3 U6.57 | length 1331.3
  Top Layer w5: U5.3 405,-1350 415,-1340 415,-1235 425,-1225 450,-1225 455,-1220 R13.1 460,-1181.73 v1(605,-1181.73) ; U6.57 619.84,-519.84 636.81,-536.81 v1(636.81,-638.19)
  Bottom Layer w5: v1(605,-1181.73) 623.27,-1181.73 636.81,-1168.19 v1(636.81,-638.19)
PA11: P1.11 U6.44 | length 512.7
  Top Layer w5: P1.11 255,-175 295,-215 590,-215 601.1,-226.1 U6.44
PA12: P1.12 U6.45 | length 589.9
  Top Layer w5: P1.12 155,-180 205,-230 575,-230 581.42,-236.42 U6.45
PB12: P4.12 U6.33 | length 1562.1
  Top Layer w5: P4.12 105,-1320 345,-1080 440,-1080 v1(490,-1030) ; v1(705,-535) 810,-535 817.64,-527.36 U6.33
  Bottom Layer w5: v1(490,-1030) 490,-560 515,-535 v1(705,-535)
PB13: P4.11 U6.34 | length 1493.3
  Top Layer w5: P4.11 104.68,-1210.32 119.68,-1210.32 265,-1065 410,-1065 v1(470,-1005) ; v1(675,-515) 780,-515 797.95,-497.05 U6.34
  Bottom Layer w5: v1@460,-1005 470,-995 470,-525 480,-515 v1(675,-515)
PB14: P4.10 U6.35 | length 1410.3
  Top Layer w5: P4.10 160.04,-1120 240,-1040.04 384.96,-1040.04 v1(450,-975) ; v1(650,-495) 750,-495 778.27,-466.73 U6.35
  Bottom Layer w5: v1(450,-975) 450,-495 v1(650,-495)
PB15: P4.9 U6.36 | length 1331.2
  Top Layer w5: P4.9 180,-1020 220,-980 395,-980 v1(430,-945) ; v1(625,-475) 729.7,-475 758.58,-446.12 U6.36
  Bottom Layer w5: v1(430,-945) 430,-475 v1(625,-475)
PC6: P4.6 U6.37 | length 1514.2
  Top Layer w5: v1(595,-455) 724.7,-455 738.9,-440.81 U6.37
  Bottom Layer w5: P4.6 175,-1320 410,-1085 410,-475.86 430.86,-455 v1(595,-455)
PC7: P4.5 U6.38 | length 1388.2
  Top Layer w5: v1(570,-435) 705,-435 719.21,-420.79 U6.38
  Bottom Layer w5: P4.5 170,-1220 395,-995 395,-476.72 436.72,-435 v1(570,-435)
PC8: P4.4 U6.39 | length 1278.1
  Top Layer w5: v1(545.08,-413.46) 686.54,-413.46 699.53,-400.47 U6.39
  Bottom Layer w5: P4.4 185,-1120 385,-920 385,-465 436.54,-413.46 v1(545.08,-413.46)
PC9: P4.3 U6.40 | length 1155
  Top Layer w5: v1(515,-390) 670,-390 679.84,-380.16 U6.40
  Bottom Layer w5: P4.3 185.35,-1020 375,-830.35 375,-460.86 445.86,-390 v1(515,-390)
PC10: P1.3 U6.51 | length 381
  Top Layer w5: v1(400,-401.73) U6.51
  Bottom Layer w5: v1(400,-401.73) 400,-280 455,-225 P1.3
PC11: P1.4 U6.52 | length 413.2
  Top Layer w5: v1(375,-421.42) U6.52 U6.52@452.91,-420
  Bottom Layer w5: P1.4 355,-401.42 v1(375,-421.42)
PC12: P1.5 U6.53 | length 516.1
  Top Layer w5: v1(295,-435) 301.71,-441.71 450.89,-441.71 U6.53
  Bottom Layer w5: P1.5 255,-395 v1(295,-435)
PD2: P1.6 U6.54 | length 621.5
  Top Layer w5: v1(260,-455) 264.7,-459.7 451.5,-459.7 U6.54
  Bottom Layer w5: P1.6 195,-95 205,-105 205,-400 v1(260,-455)
SPI1_PCS0: U4.8 U6.20 | length 242.4
  Top Layer w6: v2(825,-585) 838.58,-598.58 U6.20
  Bottom Layer w6: U4.8 805,-470 825,-490 v2(825,-585)
SPI1_PCS1: ESP1.9 U6.24 | length 343.6
  Top Layer w6: U6.24 940,-519.84 v1(940,-520)
  Bottom Layer w6: ESP1.9 913.15,-711.85 950,-675 950,-530 v1(940,-520)
SPI1_SCK: ESP1.14 U4.6 U6.21 | length 786.3
  Top Layer w6: U6.21 889.42,-579.81 1304.09,-579.81 v2(1305,-578.9)
  Bottom Layer w6: ESP1.14 1305,-790.71 v2(1305,-578.9) 1443.9,-578.9 1445,-580 U4.6
SPI1_SIN: ESP1.10 U4.7 U6.22 | length 464.3
  Top Layer w6: v2(800,-560) 887.72,-560 U6.22 974.21,-559.21 v1(975,-560)
  Bottom Layer w6: U4.7 765,-560 v2(800,-560) ; v1(975,-560) 991.89,-576.89 ESP1.10
SPI1_SOUT: ESP1.13 U4.5 U6.23 | length 850.5
  Top Layer w6: U6.23 888.79,-539.81 1224.59,-539.81 v2(1225,-539.4)
  Bottom Layer w6: ESP1.13 1225,-789.45 v2(1225,-539.4) 1384.4,-539.4 1385,-540 U4.5
UART1_RX: P1.10 U6.43 | length 441.3
  Top Layer w5: P1.10 355,-180 375,-200 605,-200 620.79,-215.79 U6.43
UART1_TX: P1.9 U6.42 | length 364.6
  Top Layer w5: P1.9 455,-165 475,-185 630.79,-185 640.47,-194.69 U6.42
UART2_RX: ESP1.22 U6.17 | length 1246.4
  Top Layer w8: U6.17 1067.64,-657.64 1088,-678 1088,-1278 1110,-1300 v1(1245,-1300)
  Bottom Layer w8: v1(1245,-1300) 1270,-1300 1280,-1310 1280,-1395 1287.8,-1402.8 ESP1.22
UART2_TX: ESP1.21 U6.16 | length 1179.9
  Top Layer w8: U6.16 1048.5,-728.5 1075,-755 1075,-1310 1090,-1325 v1(1305,-1325)
  Bottom Layer w8: v1(1305,-1325) 1424.02,-1325 ESP1.21
UART3_RX: R5.1 U6.30 | length 397.7
  Top Layer w8: U6.30 889.63,-402.86 974.78,-402.86 1137.64,-240 R5.1
UART3_TX: R6.1 U6.29 | length 570.1
  Top Layer w8: U6.29 849.69,-421.42 843.2,-414.93 843.2,-330.07 993.27,-180 R6.1
USB0_N: R1.1 USB1.2 | length 134.7
  Top Layer w15: R1.1 1851.04,-230 1866.63,-214.41 USB1.2
USB0_P: R2.1 USB1.3 | length 134.7
  Top Layer w15: R2.1 1851.04,-173.23 1866.63,-188.82 USB1.3
USB_N: R1.2 U2.6 | length 284.1
  Top Layer w15: U2.6 1580,-267.36 1580,-240 1605.89,-214.11 1763.07,-214.11 1778.96,-230 R1.2
USB_P: R2.2 U2.5 | length 323.5
  Top Layer w15: U2.5 1555,-272.36 1555,-229.64 1595.53,-189.11 1763.07,-189.11 1778.96,-173.23 R2.2
V3: C10.2 U2.4 | length 110.1
  Top Layer w10: U2.4 1495,-330 1525,-360 C10.2
Vbus: C9.2 D1.1 R3.2 R4.1 R11.1 U2.16 USB1.1 | length 2194
  Top Layer w15: C9.2 1300,-60 1317.64,-77.64 U2.16 1345,-125 1355,-135 1732.36,-135 1817.36,-50 1990,-50 2010,-70 2010,-240 ; D1.1 1690,-712.32 ; R3.2 R4.1 1720,-540 ; R11.1 1690,-712.32 ; USB1.1 1970,-240 2010,-240 ; 1690,-712.32 1712.68,-712.32 1720,-705 1720,-540 ; 1720,-540 1960,-540 2010,-490 2010,-240
VCC: C2.2 C3.2 C4.2 D1.2 D3.2 D4.A R7.1 U1.1 | length 894.4
  Top Layer w15: D4.A 1517.32,-855 D1.2 1595.35,-877.68 1640,-922.32 1687.32,-922.32 1700,-935 1700,-962.6 1742.64,-962.6 1750,-969.96 C3.2 C2.2@1845,-969.96 ; U1.1@1652.32,-1035 v4(1652.32,-1087.5) 1652.32,-1140 1653.27,-1140.94 1653.27,-1235
  Bottom Layer w15: v4(1652.32,-1087.5) 1667.5,-1087.5 1675,-1080 v4(1675,-920.28)
VFIFT: C14.2 D7.A D8.A R12.2 U3.4 U3.8 | length 1273.5
  Top Layer w15: R12.2 1891.3,-746.34 U3.4 1900,-698.27 1908.27,-690 C14.2 1908.27,-616.73 1915,-610 2080,-610 2087.64,-617.64 2087.64,-929.72 2075,-942.36 U3.8 2050,-1250 2045,-1255 2010,-1255 ; D8.A 1940,-1245 1950,-1255 2010,-1255 ; D7.A 2015,-1250 2010,-1255
pads on no net: ESP1.2 ESP1.4 ESP1.5 ESP1.6 ESP1.7 ESP1.11 ESP1.12 ESP1.17 ESP1.19 ESP1.20 U2.9 U2.10 U2.11 U2.12 U2.13 U2.14 U2.15 U3.0 U4.9 U6.2 U6.10 U6.11 U6.14 U6.41 U6.61 U6.62 USB1.0 USB1.4 Y1.2 Y1.4

## Polygon pours and split planes (outlines as drawn)
GND on Bottom Layer "GND_L02_P014" (solid, remove dead copper, pour order 14): 0,0 0,-1456.69 2215,-1456.69 2215,0
no net on Bottom Layer "NONET_L02_P012" (solid, remove dead copper, pour order 12): 215,5
GND on Bottom Layer "Bottom Layer-GND" (solid, pour order 8): 2215,0 1530,0 1530,-460 2215,-460
no net on Top Layer "NONET_L01_P010" (solid, remove dead copper, pour order 10): 170,0 0,0

## Keep-outs
Keep-Out Layer:
  the board outline again, w10

## Silkscreen, mask and mechanical layers (free items; w line width, h text height)
Top Overlay:
  text "GND" at 545,-173.23 h30 r270
  text "RXD" at 340,-175 h30 r270
  text "TXD" at 445,-175 h30 r270
  text "PA12" at 115.87,-195 h40
  text "3V3" at 630,-202.64 h40
  text "PA11" at 270,-245 h40 r90
  text "3V3" at 205,-850 h40 r90
  text "GND" at 205,-952.36 h40 r90
  text "PB15" at 205,-1060 h40 r90
  text "PB14" at 205,-1158.19 h40 r90
  text "PB13" at 205,-1260 h40 r90
  text "PB12" at 205,-1360 h40 r90
  text "NET520" at 1030,-1395 h78.74
  text "追求卓越！" at 40,-1440 h40
Bottom Overlay:
  drawing of 6902 lines, arcs and shapes, not listed
  text "PC10" at 470,-170 h40 r90
  text "PD2" at 165,-175 h40 r90
  text "PC12" at 270,-175 h40 r90
  text "PC11" at 365,-175 h40 r90
  text "PC9" at 205,-995 h40 r90
  text "PC8" at 200,-1090 h40 r90
  text "PC7" at 200,-1195 h40 r90
  text "PC6" at 200,-1290 h40 r90
  text "GND" at 2160,-1295 h78.74